# Altium PCB PCB1.PcbDoc
Units mm, origin at the board's own origin, x right, y up, seen from the top; angles counter-clockwise.
Board outline 212.98 x 111.38 mm, 2 copper layers (Top Layer, Bottom Layer); 20 components, 27 nets, 107 pads, 0 vias.
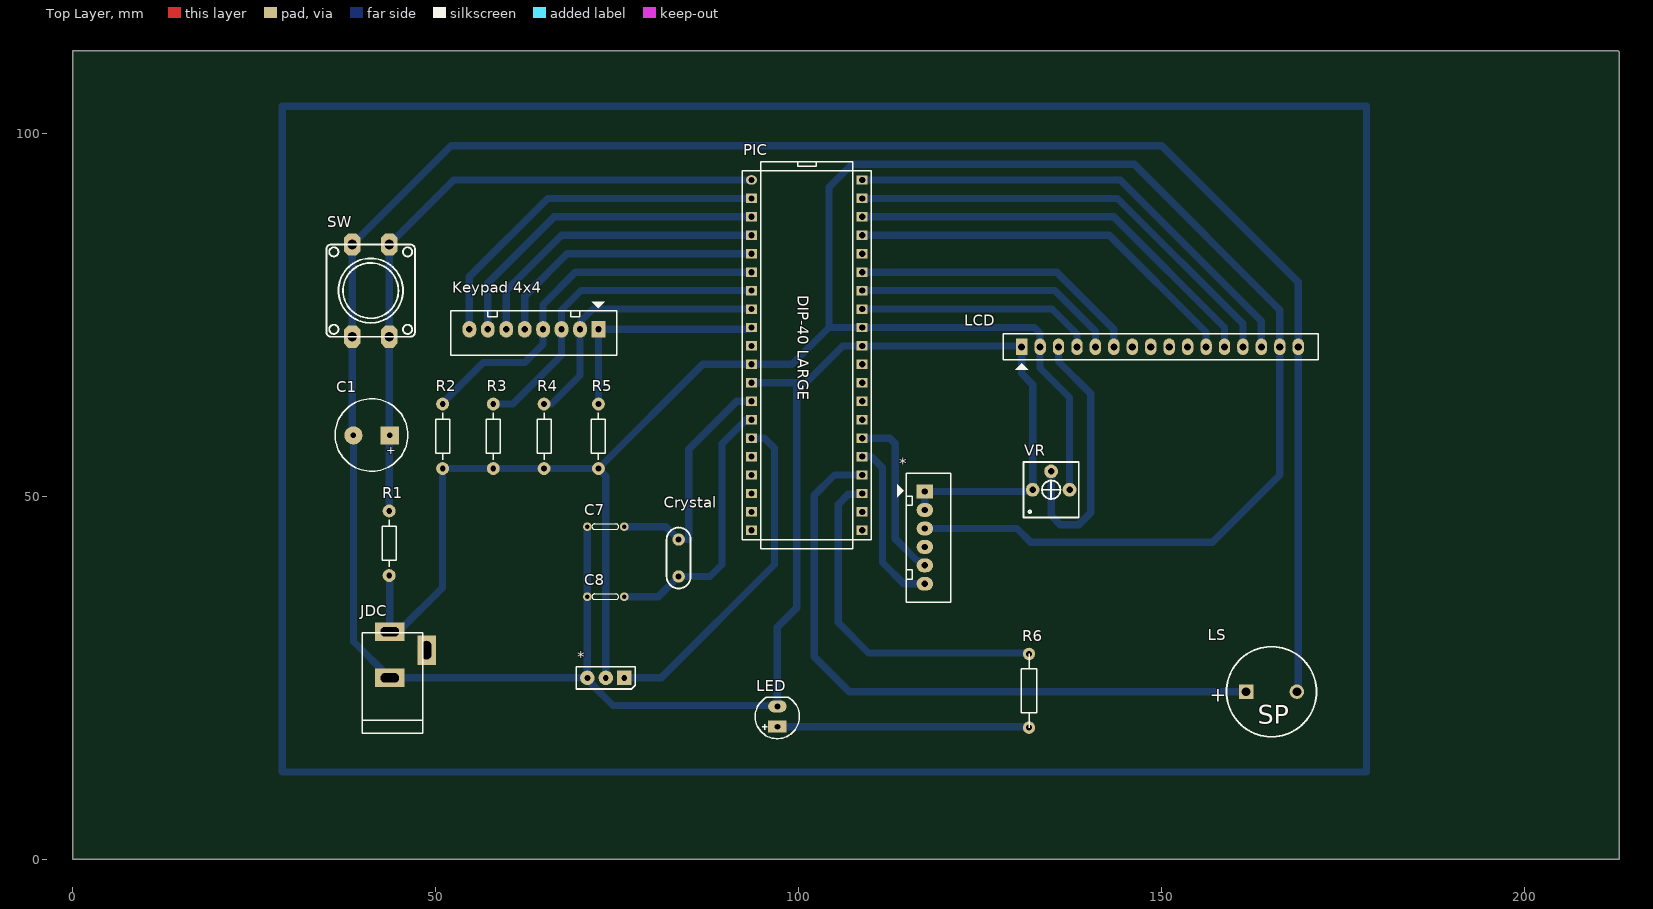
[diagram p0: Top Layer view]
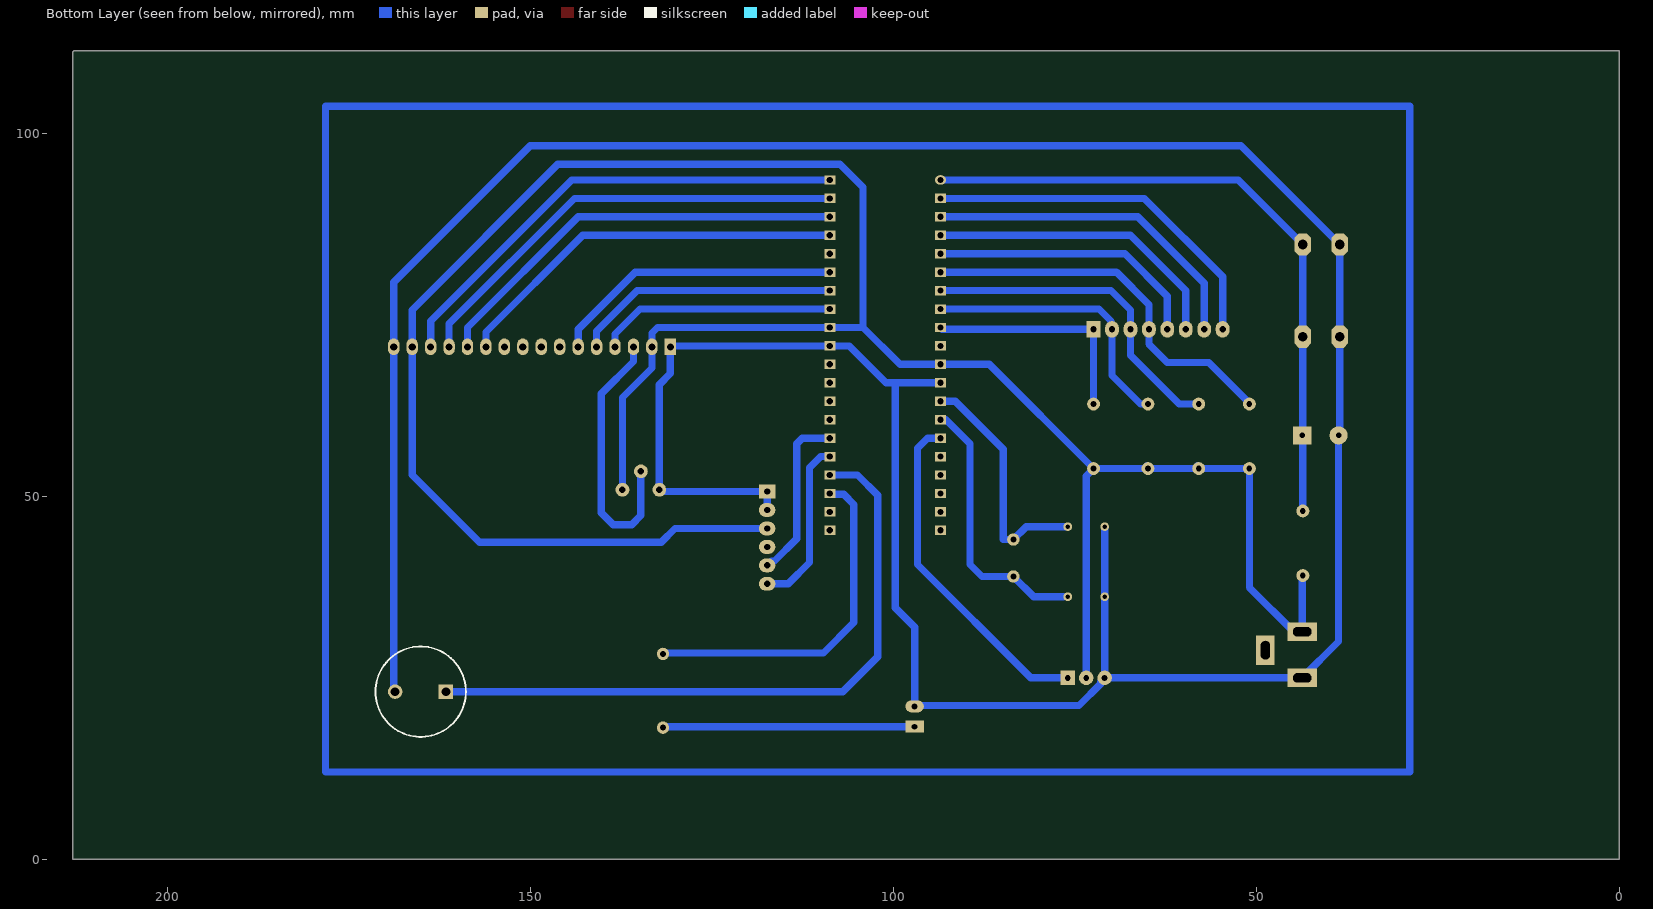
[diagram p1: Bottom Layer view, seen from below]
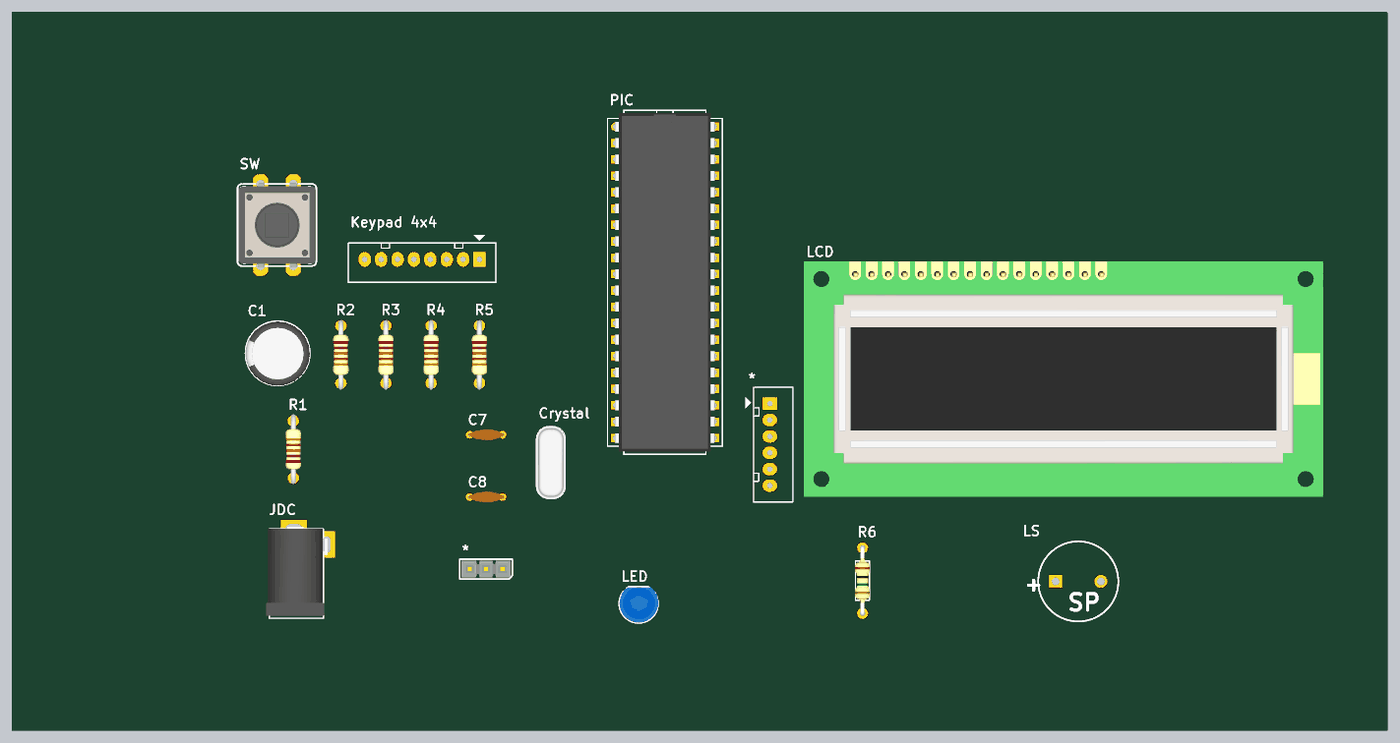
[diagram p2: 3D render of the assembled board from above, using the file's embedded part models]

## Layer stack, top to bottom
Top Solder: solder mask 0.0102, Solder Resist, Dk 3.5
Top Layer: signal copper 0.0356
Dielectric 1: dielectric 0.32, FR-4, Dk 4.8
Bottom Layer: signal copper 0.0356
Bottom Solder: solder mask 0.0102, Solder Resist, Dk 3.5

## Board outline
0,0 0,111.379 212.852,111.379 212.979,111.252 212.979,0

## Design rules (kind name [scope] priority, off if disabled: settings)
Clearance [All] p1: gap=0.5 ignorepadtopadclearanceinfootprint=FALSE
PolygonConnect [All] p1: connectstyle=Relief reliefconductorwidth=0.5 reliefentries=4 polygonreliefangle="90 Angle" airgapwidth=0.5
RoutingLayers [All] p1: top layer_v5=FALSE bottom layer_v5=TRUE
RoutingVias [All] p1: holewidth=0.711 width=1.27 viastyle="Through Hole" minholewidth=0.711 minwidth=1.27 maxholewidth=0.711 maxwidth=1.27
SolderMaskExpansion [All] p1: expansion=0.102
Width [All] p1: maxlimit=3 minlimit=1 preferedwidth=1
29 further rules are at their usual default settings.

## Components (designator, comment, footprint, x,y, rotation, side; value= is the part's Value field where it differs from the comment)
* "Module Sim800a mini" CON6 117.348,50.673 r270 top
* "Servo" CON3-2 77.47,23.495 r180 top
C1 "1000uF" "Cap 10mm" 41.148,58.42 r0 top value=10uF/50V
C7 "Capacitor Ceramic" Tu-ceramic 70.866,45.847 r0 top value=33p
C8 "Capacitor Ceramic" Tu-ceramic 70.866,36.195 r0 top value=33p
Crystal "20MHz" XTAL 83.439,41.529 r180 top
JDC "Jac DC" DC-IN 46.188,28.194 r90 top
"Keypad 4x4" "Component_1" CON8 72.39,73.025 r180 top
LCD "LCD 16x2A" LCD16X2N 130.683,70.612 r0 top value=LCD16x2A
LED "LED" "LED-5mm BLUE" 97.028,19.685 r90 top
LS "SPEAKER" speaker 165.1,23.114 r0 top
PIC "PIC16F877A-E/P" DIP.100/40/W.600/L2.100 101.092,69.469 r270 top
R1 "10k" R1/4W 43.561,48.006 r270 top value="R1/4W - 1K"
R2 "10k" R1/4W 50.927,53.848 r90 top value="R1/4W - 1K"
R3 "10k" R1/4W 57.912,53.848 r90 top value="R1/4W - 1K"
R4 "10k" R1/4W 64.897,53.848 r90 top value="R1/4W - 1K"
R5 "10k" R1/4W 72.39,53.848 r90 top value="R1/4W - 1K"
R6 "RESISTOR" "Res 10mm (1/2W)" 131.699,23.241 r270 top value=1K
SW "SW-2P-S" SW-BIG 38.481,84.709 r90 top
VR "10K" VR_3362P 132.207,50.927 r0 top value="VR 10K"

## Footprints (in the part's own frame and the unit in brackets; to place one, negate y for a bottom-side part, rotate by r counter-clockwise, add the part's x,y. Pads: shape width x height; smd on the part's side, far side on the other; paste and mask are expansions set on the pad)
"Cap 10mm" [mm] "Cap d=10mm, pitch=5mm"
  rect 2.5x2.5 hole 0.75: 1(2.5,0)
  round 2.5 hole 0.75: 2(-2.5,0)
  silkscreen extent -5.01,-4.95 4.98,5.05, body extent -5.01,-5 5,5, height 16.31
CON3-2 [mm] "CON3 THANG"
  rect 2x2 hole 0.8: 1(1.524,-1.524)
  round 2 hole 0.8: 2(4.064,-1.524) 3(6.604,-1.524)
  silkscreen extent 0,-3.05 8.13,0, body extent 0.25,-2.79 7.87,-0.25, height 2.11
CON6 [mil] "CON6"
  rect 75x90 hole 34: 1(0,0)
  oval 75x90 hole 34: 2(100,0) 3(200,0) 4(300,0) 5(400,0) 6(500,0)
  silkscreen extent -100,-150 600,140
CON8 [mil] "CON8"
  rect 75x90 hole 34: 1(0,0)
  oval 75x90 hole 34: 2(100,0) 3(200,0) 4(300,0) 5(400,0) 6(500,0) 7(600,0) 8(700,0)
  silkscreen extent -100,-150 800,140
DC-IN [mil] "Jac DC input"
  rect 100x160 hole 50 slot 100 at 90 deg: 1(125,100) 2(-125,100)
  rect 160x100 hole 50 slot 100 at 0 deg: 3(25,-100)
  silkscreen extent -425,-80 120,250, body extent -410,-105 134,269, height 434
DIP.100/40/W.600/L2.100 [mil]
  oval 51.18x59.06 hole 34: 1(-950,-300)
  rect 51x59 / inner round 58 / far side rect 51x59 hole 34: 2(-850,-300) 3(-750,-300) 4(-650,-300) 5(-550,-300) 6(-450,-300) 7(-350,-300) 8(-250,-300) 9(-150,-300) 10(-50,-300) 11(50,-300) 12(150,-300) 13(250,-300) 14(350,-300) 15(450,-300) 16(550,-300) 17(650,-300) 18(750,-300) 19(850,-300) 20(950,-300) 21(950,300) 22(850,300) 23(750,300) 24(650,300) 25(550,300) 26(450,300) 27(350,300) 28(250,300) 29(150,300) 30(50,300) 31(-50,300) 32(-150,300) 33(-250,300) 34(-350,300) 35(-450,300) 36(-550,300) 37(-650,300) 38(-750,300) 39(-850,300) 40(-950,300)
  silkscreen extent -1050,-350 1050,350, body extent -1032,-305 1032,305, height 224
LCD16X2N [mil] "LCD dipslay 16x2, 16 pin"
  rect 62x90 hole 39: 1(0,0)
  oval 62x90 hole 39: 2(100,0) 3(200,0) 4(300,0) 5(400,0) 6(500,0) 7(600,0) 8(700,0) 9(800,0) 10(900,0) 11(1000,0) 12(1100,0) 13(1200,0) 14(1300,0) 15(1400,0) 16(1500,0)
  silkscreen extent -100,-125 1608,70, body extent -320,-1353 2850,84, height 764
"LED-5mm BLUE" [mil] "LED-5mm BLUE"
  rect 65x100 hole 32: 1(-55,0)
  oval 65x100 hole 32: 2(55,0)
  silkscreen extent -120,-120 104,120, body extent -113,-120 100,117, height 339
R1/4W [mil] "R 1/4W, 2 Pin, 350mil"
  round 70 hole 31: 1(0,0) 2(350,0)
  silkscreen extent 48,-38 302,38, body extent -40,-47 386,47, height 111
"Res 10mm (1/2W)" [mil] "Resistor; 2 Leads; 1/2W; Solder Pad 35mil"
  round 67 hole 32: 1(-200,0) 2(200,0)
  silkscreen extent -200,-43 200,42, body extent -212,-46 212,45, height 96
speaker [mm] "Speaker footprint"
  rect 2x2 hole 1.2: 1(-3.5,0)
  round 2 hole 1.2: 2(3.5,0)
  silkscreen extent -6.2,-6.2 6.2,6.2, body extent -6.2,-6.2 6.2,6.2, height 10.02
SW-BIG [mil]
  oct 120x90 hole 52: 1(-500,0) 1(0,0) 2(-500,-200) 2(0,-200)
  silkscreen extent -500,-340 0,140, body extent -507,-338 5,134, height 288
Tu-ceramic [mm] "Tu gom mini"
  round 1.2 hole 0.6: 1(0,0) 2(5.08,0)
  silkscreen extent 0.64,-0.38 4.32,0.38, body extent -0.38,-0.85 5.46,0.85, height 6.12
VR_3362P [mil] "Resistor Variable"
  round 75 hole 35: 1(0,0) 2(100,100) 3(200,0)
  silkscreen extent -50,-150 250,150, body extent -30,-148 230,130, height 185
XTAL [mil] "Crystal, Thru-Hole; 2 Leads; Body 3.1 x 8.2 mm (Dia.xH); Solder pad 35mil"
  round 67 hole 32: 1(0,100) 2(0,-100)
  silkscreen extent -65,-165 65,165, body extent -92,-223 92,223, height 139

## Part data
C1: library part CP1, "Cap P  0,1uF < 22uF , 16 - 50V", Description 1="10 => 220uF/6,3V/10V - 10uF => 100uF/16V", Description 2="0,1uF => 33uF/50V - 10uF => 22uF/63V", Description 3="0,47uF => 10uF/100V"
C7 C8: library part CapDecop, "Capacitor", LatestRevisionDate=17-Jul-2002, LatestRevisionNote="Re-released for DXP Platform.", PackageReference=RAD-0.3, Published=8-Jun-2000, Publisher="Altium Limited"
Crystal: library part XTAL, "Crystal Oscillator", LatestRevisionDate=17-Jul-2002, LatestRevisionNote="Re-released for DXP Platform.", PackageReference=R38, Published=8-Jun-2000, Publisher="Altium Limited"
JDC: library part DCIN, "Jac DC input"
LCD: library part LCD16x2A, "LCD dipslay 16 char, 2 line"
PIC: "Enhanced FLASH Microcontroller, 8K (x14-Bit words) FLASH, 368 Bytes RAM, 40-Pin PDIP, Standard VDD Range, Extended Temperature", PackageDocument=2003, Code_JEDEC=MO-011, ComponentLink1Description="Manufacturer Link", ComponentLink1URL=http://www.microchip.com/index.asp, ComponentLink2Description=Datasheet, ComponentLink2URL=http://ww1.microchip.com/downloads/en/DeviceDoc/39582b.pdf, ComponentLink3Description="Packaging Specification", ComponentLink3URL=http://ww1.microchip.com/downloads/en/PackagingSpec/00049AD.pdf, DatasheetDocument=DS39582B_2003, LatestRevisionDate=4-Mar-2005, LatestRevisionNote="Stylized 3D Model Added.", Note="25mA sink/source per I/O.", PackageReference=PDIP600-40, Published=11-Oct-2004, Publisher="Altium Limited"
R1 R2 R3 R4 R5: library part R, "Resistor 1/4W"
R6: "Resistor", LatestRevisionDate=17-Jul-2002, LatestRevisionNote="Re-released for DXP Platform.", PackageReference=AXIAL-0.3, Published=8-Jun-2000, Publisher="Altium Limited"
SW: library part SW-2PIN-SMALL, "Switch Small 2 Pin", LatestRevisionDate=17-Jul-2002, LatestRevisionNote="Re-released for DXP Platform.", PackageReference=SPST-2, Published=24-Mar-1999, Publisher="Altium Limited"
VR: library part VR1, "Var Resistor"
LS: ComponentLink1Description="Digikey Part Link", ComponentLink2Description="Open Datasheet", ComponentLink2URL=H:\LIBRARY\LIBRARY.Datasheet\, Published=13-April-2009, Publisher="Hoang Nguyen", Vendor=Digikey

## Nets (pads, with @x,y where several pads share a name; then routed paths per layer and width w, separated by ;. In a path a pad name is that pad's centre, name@x,y a point inside that pad or via, vN(x,y) a via of type N, cw(c..) or ccw(c..) an arc to the next point about the centre after c; other vN are vias at no path point)
5V: *.2@73.406,25.019 *.3@117.348,45.593 JDC.1 LCD.2 LCD.15 PIC.11 PIC.32 R1.2 R2.1 R3.1 R4.1 R5.1 VR.3 | length 345
  Bottom Layer w1: R1.2 43.648,39.029 JDC.1 44.831,31.369 50.927,37.465 R2.1 R3.1 65.151,53.848 R5.1 ; R3.1@57.785,53.975 R3.1@58.039,54.229 ; R4.1@65.024,54.229 R4.1@65.151,54.102 ; *.2@73.406,25.019 73.406,52.832 R5.1 ; *.3@117.348,45.593 130.048,45.593 131.953,43.688 156.972,43.688 166.243,52.959 LCD.15 166.243,75.692 146.177,95.758 107.315,95.758 104.14,92.583 104.14,73.279 ; VR.3 137.287,63.627 133.223,67.691 LCD.2 133.223,72.517 132.461,73.279 PIC.32 104.14,73.279 ; R5.1 86.741,68.199 PIC.11 99.06,68.199 104.14,73.279
A0: "Keypad 4x4.8" PIC.2 | length 50.6
  Bottom Layer w1: 54.61,73.025 54.61,80.264 65.405,91.059 PIC.2
A1: "Keypad 4x4.7" PIC.3 | length 46.5
  Bottom Layer w1: 57.15,73.025 57.15,79.375 66.294,88.519 PIC.3
A2: "Keypad 4x4.6" PIC.4 | length 42.3
  Bottom Layer w1: 59.69,73.025 59.69,78.359 67.31,85.979 PIC.4
A3: "Keypad 4x4.5" PIC.5 | length 38.2
  Bottom Layer w1: 62.23,73.025 62.23,77.597 68.072,83.439 PIC.5
A4: "Keypad 4x4.4" PIC.6 R2.2 | length 53.3
  Bottom Layer w1: R2.2 50.927,62.865 56.515,68.453 62.23,68.453 64.77,70.993 64.77,73.025 64.77,76.454 69.215,80.899 PIC.6
A5: "Keypad 4x4.3" PIC.7 R3.2 | length 45.7
  Bottom Layer w1: R3.2 60.579,62.738 67.31,69.469 67.31,73.025 67.31,75.692 69.977,78.359 PIC.7
B0: LCD.4 PIC.33 | length 32.8
  Bottom Layer w1: PIC.33 134.874,75.819 138.303,72.39 LCD.4
B1: LCD.5 PIC.34 | length 36.6
  Bottom Layer w1: PIC.34 135.255,78.359 140.843,72.771 LCD.5
B2: LCD.6 PIC.35 | length 40.3
  Bottom Layer w1: PIC.35 135.509,80.899 143.383,73.025 LCD.6
B4: LCD.11 PIC.37 | length 54.9
  Bottom Layer w1: PIC.37 142.748,85.979 156.083,72.644 LCD.11
B5: LCD.12 PIC.38 | length 58.9
  Bottom Layer w1: PIC.38 143.383,88.519 158.623,73.279 LCD.12
B6: LCD.13 PIC.39 | length 62.8
  Bottom Layer w1: PIC.39 143.891,91.059 161.163,73.787 LCD.13
B7: LCD.14 PIC.40 | length 66.6
  Bottom Layer w1: PIC.40 144.272,93.599 163.703,74.168 LCD.14
E0: "Keypad 4x4.2" PIC.8 R4.2 | length 38.1
  Bottom Layer w1: R4.2@65.151,62.738 65.913,62.738 69.85,66.675 69.85,73.025 69.977,73.152 69.977,74.168 71.628,75.819 PIC.8
E1: "Keypad 4x4.1" PIC.9 R5.2 | length 31.5
  Bottom Layer w1: R5.2 72.39,73.025 93.218,73.025 PIC.9
GND: *.1@117.348,50.673 *.2@117.348,48.133 *.3@70.866,25.019 C1.2 C7.1 C8.1 JDC.2 LCD.1 LCD.16 LED.2 LS.2 PIC.12 PIC.31 SW.1 VR.1 | length 460.9
  Bottom Layer w1: C7.1 C8.1 *.3@70.866,25.019 ; PIC.12 99.695,65.659 ; *.2@117.348,48.133 117.348,50.673 131.953,50.673 VR.1 132.207,65.405 130.683,66.929 LCD.1 130.556,70.739 PIC.31 106.045,70.739 100.965,65.659 99.695,65.659 ; LS.2 168.783,23.297 LCD.16 168.783,79.502 149.987,98.298 52.07,98.298 38.481,84.709 38.481,72.009 38.481,58.587 C1.2 38.648,30.019 JDC.2 *.3@70.866,25.019 ; *.3@70.866,25.019 71.406,24.479 71.406,24.191 74.388,21.209 96.901,21.209 LED.2 97.028,32.004 99.695,34.671 99.695,65.659
Net*_1: *.1@75.946,25.019 PIC.15 | length 47.3
  Bottom Layer w1: *.1@75.946,25.4 75.946,25.019 81.026,25.019 96.647,40.64 96.647,56.642 95.25,58.039 PIC.15
NetC1_1: C1.1 PIC.1 R1.1 SW.2 | length 90.4
  Bottom Layer w1: R1.1 43.561,58.333 C1.1 43.561,58.507 43.561,72.009 43.561,84.709 52.451,93.599 PIC.1
NetLCD_3: LCD.3 VR.2 | length 37.5
  Bottom Layer w1: VR.2 134.747,47.371 136.017,46.101 138.557,46.101 140.208,47.752 140.208,64.135 135.763,68.58 LCD.3
NetLED_1: LED.1 R6.2 | length 34.7
  Bottom Layer w1: LED.1 131.572,18.288 R6.2
NetLS_1: LS.1 PIC.24 | length 91.5
  Bottom Layer w1: PIC.24 104.902,52.959 102.108,50.165 102.108,27.94 106.934,23.114 LS.1
NetPIC_23: PIC.23 R6.1 | length 48.3
  Bottom Layer w1: PIC.23 108.585,50.292 106.807,50.292 105.41,48.895 105.41,32.639 109.601,28.448 131.572,28.448 R6.1
Rx: *.5 PIC.26 | length 23.6
  Bottom Layer w1: PIC.26 112.522,58.039 113.284,57.277 113.284,44.165 116.349,41.1 116.761,41.1 *.5
TA1: C7.2 Crystal.2 PIC.13 | length 33.1
  Bottom Layer w1: C7.2@76.327,45.847 81.661,45.847 Crystal.2 84.836,44.069 84.836,56.515 91.44,63.119 PIC.13
TA2: C8.2 Crystal.1 PIC.14 | length 36.9
  Bottom Layer w1: 76.581,36.195 80.645,36.195 Crystal.1 87.757,38.989 89.408,40.64 89.408,57.277 92.71,60.579 PIC.14 PIC.14@93.345,60.452
Tx: *.6 PIC.25 | length 23.6
  Bottom Layer w1: PIC.25 109.982,55.499 111.506,53.975 111.506,40.894 114.427,37.973 *.6
pads on no net: *.4 JDC.3 LCD.7 LCD.8 LCD.9 LCD.10 PIC.10 PIC.16 PIC.17 PIC.18 PIC.19 PIC.20 PIC.21 PIC.22 PIC.27 PIC.28 PIC.29 PIC.30 PIC.36
copper on no net: | length 482.1
  Bottom Layer w1: 28.829,12.065 178.181,12.065 178.181,103.759 28.829,103.759 28.829,12.065

## Text inside footprints (layer, text, board x,y; h text height)
C1: Top Overlay "+" at 43.148,55.42 h2
LS: Top Overlay "SP" at 163.195,18.669 h2.54; Top Overlay "+" at 156.591,21.717 h2.03
PIC: Top Overlay "DIP-40 LARGE" at 99.822,77.724 h1.5 r270